# EAGLE board 8x8_3mm_1.6x1.6_skewed_headers_multiplexed (EAGLE 6.0)
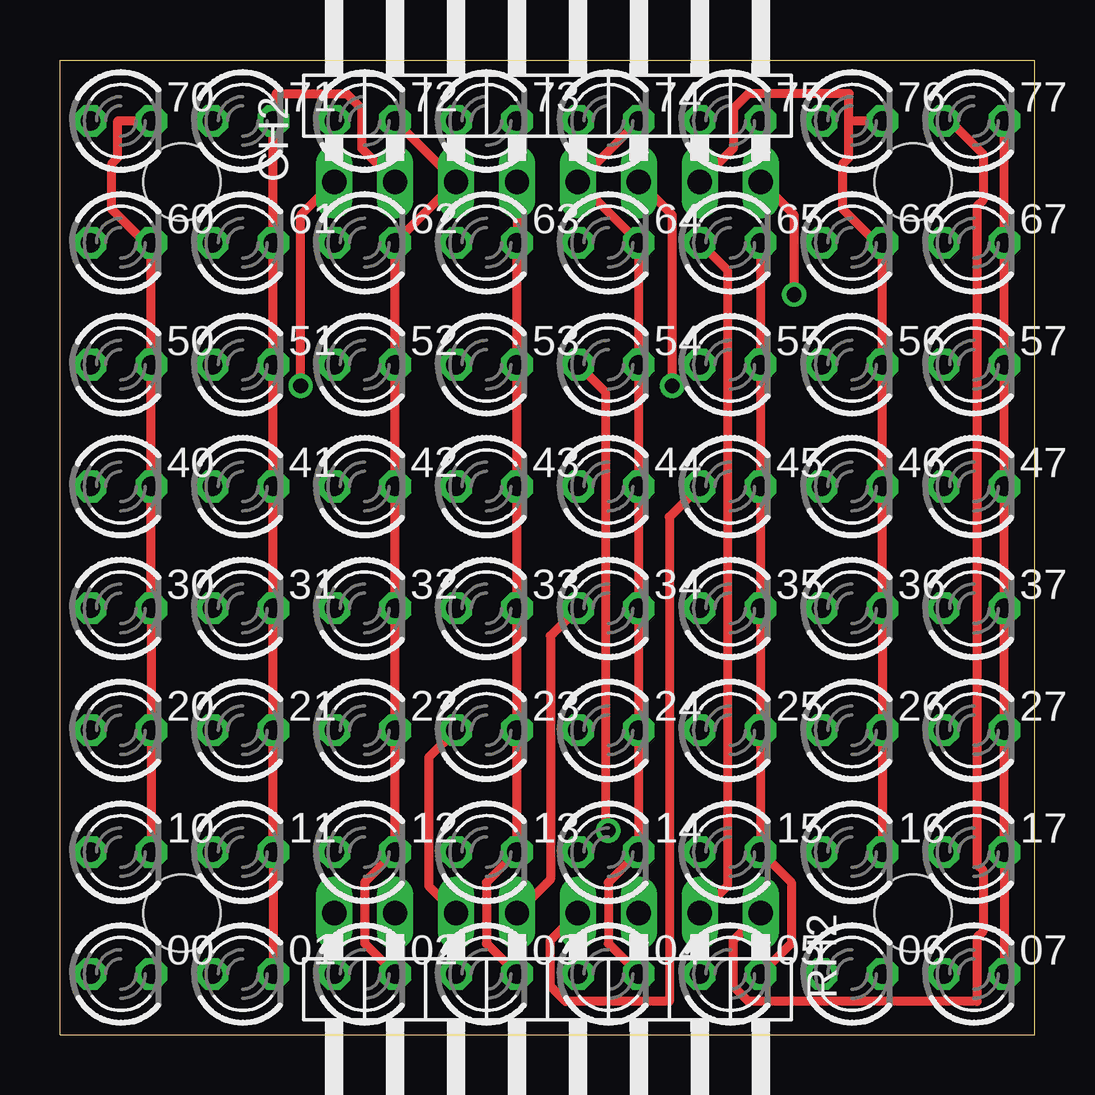
[diagram p0: board, top side]
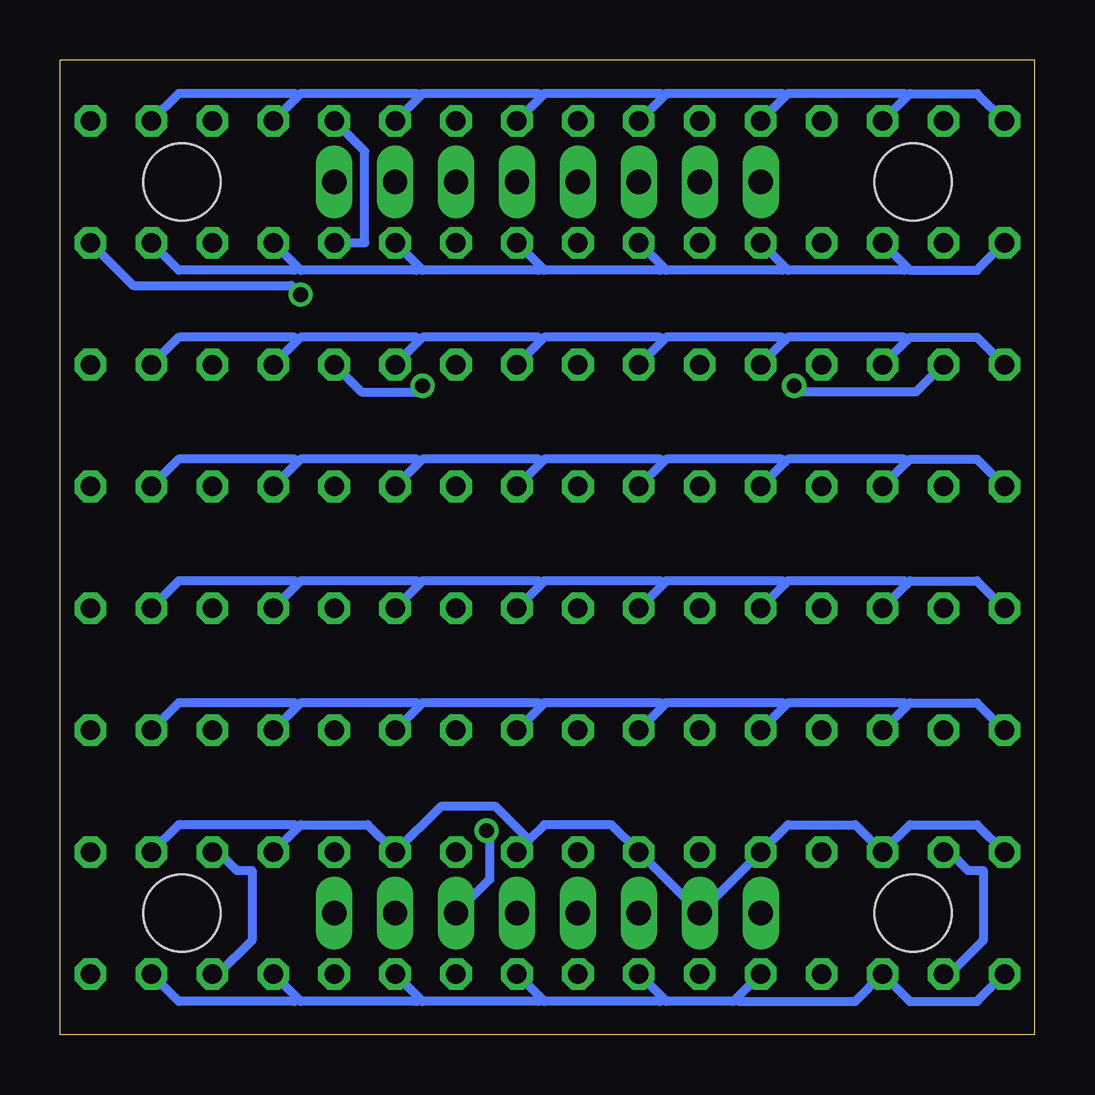
[diagram p1: board, bottom side, seen from below]

Size 40.64 x 40.64 mm. Coordinates in mm from the lower left corner, seen from the top.
Outline: 0,0 0,40.64 40.64,40.64 40.64,0 0,0
Copper layers (1*16): Top 0.035mm / dielectric 1.5mm / Bottom 0.035mm
Design rules: minimum track width 15mil, minimum drill 24mil, track to track 10mil, track to pad 10mil, pad to pad 8mil, via to via 8mil, smd to smd 8mil, copper to edge 40mil, drill to drill 8mil, minimum pad ring 10mil, minimum via ring 8mil, stop-mask expansion 4mil, vias tented up to drill 0mil, thermal gap 10mil
Holes 3.2 mm at 5.08,35.56 35.56,35.56 35.56,5.08 5.08,5.08

## Footprints (pad centres in the part's own frame; a part is rotated, then mirrored left to right if it is on the bottom)
LED3MM = drill 0.813 octagon: A -1.27,0; K 1.27,0
1X08/90 = drill 1.016 long: 1 -8.89,-3.81; 2 -6.35,-3.81; 3 -3.81,-3.81; 4 -1.27,-3.81; 5 1.27,-3.81; 6 3.81,-3.81; 7 6.35,-3.81; 8 8.89,-3.81

## Placement (x,y rotation side)
00  [LED3MM]  2.54,2.54 0 top
01  [LED3MM]  7.62,2.54 0 top
02  [LED3MM]  12.7,2.54 0 top
03  [LED3MM]  17.78,2.54 0 top
04  [LED3MM]  22.86,2.54 0 top
05  [LED3MM]  27.94,2.54 0 top
06  [LED3MM]  33.02,2.54 0 top
07  [LED3MM]  38.1,2.54 0 top
10  [LED3MM]  2.54,7.62 0 top
11  [LED3MM]  7.62,7.62 0 top
12  [LED3MM]  12.7,7.62 0 top
13  [LED3MM]  17.78,7.62 0 top
14  [LED3MM]  22.86,7.62 0 top
15  [LED3MM]  27.94,7.62 0 top
16  [LED3MM]  33.02,7.62 0 top
17  [LED3MM]  38.1,7.62 0 top
20  [LED3MM]  2.54,12.7 0 top
21  [LED3MM]  7.62,12.7 0 top
22  [LED3MM]  12.7,12.7 0 top
23  [LED3MM]  17.78,12.7 0 top
24  [LED3MM]  22.86,12.7 0 top
25  [LED3MM]  27.94,12.7 0 top
26  [LED3MM]  33.02,12.7 0 top
27  [LED3MM]  38.1,12.7 0 top
30  [LED3MM]  2.54,17.78 0 top
31  [LED3MM]  7.62,17.78 0 top
32  [LED3MM]  12.7,17.78 0 top
33  [LED3MM]  17.78,17.78 0 top
34  [LED3MM]  22.86,17.78 0 top
35  [LED3MM]  27.94,17.78 0 top
36  [LED3MM]  33.02,17.78 0 top
37  [LED3MM]  38.1,17.78 0 top
40  [LED3MM]  2.54,22.86 0 top
41  [LED3MM]  7.62,22.86 0 top
42  [LED3MM]  12.7,22.86 0 top
43  [LED3MM]  17.78,22.86 0 top
44  [LED3MM]  22.86,22.86 0 top
45  [LED3MM]  27.94,22.86 0 top
46  [LED3MM]  33.02,22.86 0 top
47  [LED3MM]  38.1,22.86 0 top
50  [LED3MM]  2.54,27.94 0 top
51  [LED3MM]  7.62,27.94 0 top
52  [LED3MM]  12.7,27.94 0 top
53  [LED3MM]  17.78,27.94 0 top
54  [LED3MM]  22.86,27.94 0 top
55  [LED3MM]  27.94,27.94 0 top
56  [LED3MM]  33.02,27.94 0 top
57  [LED3MM]  38.1,27.94 0 top
60  [LED3MM]  2.54,33.02 0 top
61  [LED3MM]  7.62,33.02 0 top
62  [LED3MM]  12.7,33.02 0 top
63  [LED3MM]  17.78,33.02 0 top
64  [LED3MM]  22.86,33.02 0 top
65  [LED3MM]  27.94,33.02 0 top
66  [LED3MM]  33.02,33.02 0 top
67  [LED3MM]  38.1,33.02 0 top
70  [LED3MM]  2.54,38.1 0 top
71  [LED3MM]  7.62,38.1 0 top
72  [LED3MM]  12.7,38.1 0 top
73  [LED3MM]  17.78,38.1 0 top
74  [LED3MM]  22.86,38.1 0 top
75  [LED3MM]  27.94,38.1 0 top
76  [LED3MM]  33.02,38.1 0 top
77  [LED3MM]  38.1,38.1 0 top
CH2  [1X08/90]  20.32,39.37 0 top
RH2  [1X08/90]  20.32,1.27 180 top

## Library data of the parts
00 01-07 10-17 20-27 30-37 40-47 50-57 60-67 70-77 = led
CH2 RH2 = pinhead

## Nets
C0: 00.K 10.K 20.K 30.K 40.K 50.K 60.K 70.K CH2.1
C1: 01.K 11.K 21.K 31.K 41.K 51.K 61.K 71.K CH2.2
C2: 02.K 12.K 22.K 32.K 42.K 52.K 62.K 72.K CH2.3
C3: 03.K 13.K 23.K 33.K 43.K 53.K 63.K 73.K CH2.4
C4: 04.K 14.K 24.K 34.K 44.K 54.K 64.K 74.K CH2.5
C5: 05.K 15.K 25.K 35.K 45.K 55.K 65.K 75.K CH2.6
C6: 06.K 16.K 26.K 36.K 46.K 56.K 66.K 76.K CH2.7
C7: 07.K 17.K 27.K 37.K 47.K 57.K 67.K 77.K CH2.8
R0: 00.A 01.A 02.A 03.A 04.A 05.A 06.A 07.A RH2.8
R1: 10.A 11.A 12.A 13.A 14.A 15.A 16.A 17.A RH2.7
R2: 20.A 21.A 22.A 23.A 24.A 25.A 26.A 27.A RH2.6
R3: 30.A 31.A 32.A 33.A 34.A 35.A 36.A 37.A RH2.5
R4: 40.A 41.A 42.A 43.A 44.A 45.A 46.A 47.A RH2.4
R5: 50.A 51.A 52.A 53.A 54.A 55.A 56.A 57.A RH2.3
R6: 60.A 61.A 62.A 63.A 64.A 65.A 66.A 67.A RH2.2
R7: 70.A 71.A 72.A 73.A 74.A 75.A 76.A 77.A RH2.1

## Tracks (layer width: path | path; a pad name or v marks a point on that pad's centre or on a via)
C0  (via drill 0.61)
  Top 0.381: 70.K 2.41,38.1 2.41,36.58 2.16,36.32 2.16,34.42 3.68,32.89 60.K 50.K 40.K 30.K 20.K 10.K | CH2.1 10.03,34.16 v10.03,27.05
  Bottom 0.381: 00.K 3.56,2.54 2.16,3.94 2.16,6.86 2.79,6.86 3.56,7.62 10.K | v10.03,27.05 9.78,26.8 4.95,26.8 50.K
C1
  Top 0.381: 01.K 11.K 21.K 31.K 41.K 51.K 61.K 71.K 9.02,38.23 9.02,39.24 11.94,39.24 12.57,38.61 12.57,36.96 CH2.2
C2
  Top 0.381: 72.K CH2.3 62.K 52.K 42.K 32.K 22.K 12.K 12.7,6.35 12.7,3.81 02.K
C3
  Top 0.381: 73.K CH2.4 63.K 53.K 43.K 33.K 23.K 13.K 17.78,6.35 17.78,3.81 03.K
C4
  Top 0.381: 74.K CH2.5 64.K 54.K 44.K 34.K 24.K 14.K 22.86,6.35 22.86,3.81 04.K
C5  (via drill 0.61)
  Top 0.381: 05.K 30.48,3.81 30.48,6.35 15.K 25.K 35.K 45.K 55.K 65.K | CH2.6 25.53,34.16 v25.53,27.05
  Bottom 0.381: 75.K 27.94,36.83 27.94,33.02 65.K | v25.53,27.05 25.78,26.8 28.07,26.8 55.K
C6
  Top 0.381: 32.89,38.1 76.K | 32.89,38.1 32.89,36.58 32.64,36.32 32.64,34.42 34.16,32.89 66.K 56.K 46.K 36.K 26.K 16.K | CH2.7 28.07,36.96 28.07,38.61 28.7,39.24 32.89,39.24 32.89,38.1
  Bottom 0.381: 06.K 34.04,2.54 32.64,3.94 32.64,6.86 33.27,6.86 34.04,7.62 16.K
C7  (via drill 0.61)
  Top 0.381: 07.K 17.K 27.K 37.K 47.K 57.K 67.K 77.K | CH2.8 30.61,34.16 v30.61,30.86
  Bottom 0.381: v30.61,30.86 30.99,31.24 37.59,31.24 67.K
R0
  Top 0.381: RH2.8 02.A
  Bottom 0.381: 00.A 2.41,1.4 5.21,1.4 01.A 7.49,1.4 12.32,1.4 12.45,1.52 | 15.49,1.52 15.37,1.4 12.57,1.4 12.45,1.52 | 15.49,1.52 03.A | 02.A 12.45,1.52 | 20.57,1.52 20.45,1.4 15.62,1.4 15.49,1.52 | 20.57,1.52 04.A | 25.65,1.52 25.53,1.4 20.7,1.4 20.57,1.52 | 25.65,1.52 05.A | 30.73,1.52 30.61,1.4 25.78,1.4 25.65,1.52 | 30.73,1.52 06.A | 07.A 35.69,1.4 30.86,1.4 30.73,1.52
R1
  Bottom 0.381: 16.A 30.73,8.64 | 30.73,8.64 30.61,8.76 27.81,8.76 15.A 24.77,9.53 22.48,9.53 21.08,8.13 | 17.A 35.69,8.76 30.86,8.76 30.73,8.64 | 10.A 2.41,8.76 5.21,8.76 11.A 7.49,8.76 10.29,8.76 12.A RH2.7 13.A 17.65,8.76 20.45,8.76 21.08,8.13 | 21.08,8.13 14.A
R2
  Top 0.381: RH2.6 15.37,6.22 15.37,11.56 23.A
  Bottom 0.381: 20.A 2.41,13.84 5.21,13.84 5.33,13.72 | 21.A 5.33,13.72 | 10.41,13.72 10.29,13.84 5.46,13.84 5.33,13.72 | 10.41,13.72 22.A | 15.49,13.72 15.37,13.84 10.54,13.84 10.41,13.72 | 15.49,13.72 23.A | 20.57,13.72 20.45,13.84 15.62,13.84 15.49,13.72 | 20.57,13.72 24.A | 25.65,13.72 25.53,13.84 20.7,13.84 20.57,13.72 | 25.65,13.72 25.A | 30.73,13.72 30.61,13.84 25.78,13.84 25.65,13.72 | 30.73,13.72 26.A | 27.A 35.69,13.84 30.86,13.84 30.73,13.72
R3
  Top 0.381: RH2.5 20.45,6.48 20.45,16.64 34.A
  Bottom 0.381: 30.A 2.41,18.92 5.21,18.92 5.33,18.8 | 31.A 5.33,18.8 | 10.41,18.8 10.29,18.92 5.46,18.92 5.33,18.8 | 10.41,18.8 32.A | 15.49,18.8 15.37,18.92 10.54,18.92 10.41,18.8 | 15.49,18.8 33.A | 20.57,18.8 20.45,18.92 15.62,18.92 15.49,18.8 | 20.57,18.8 34.A | 25.65,18.8 25.53,18.92 20.7,18.92 20.57,18.8 | 25.65,18.8 35.A | 30.73,18.8 30.61,18.92 25.78,18.92 25.65,18.8 | 30.73,18.8 36.A | 37.A 35.69,18.92 30.86,18.92 30.73,18.8
R4
  Top 0.381: RH2.4 20.45,3.94 20.45,2.03 21.08,1.4 25.4,1.4 25.4,21.59 45.A
  Bottom 0.381: 40.A 2.41,24 5.21,24 5.33,23.88 | 41.A 5.33,23.88 | 10.41,23.88 10.29,24 5.46,24 5.33,23.88 | 10.41,23.88 42.A | 15.49,23.88 15.37,24 10.54,24 10.41,23.88 | 15.49,23.88 43.A | 20.57,23.88 20.45,24 15.62,24 15.49,23.88 | 20.57,23.88 44.A | 25.65,23.88 25.53,24 20.7,24 20.57,23.88 | 25.65,23.88 45.A | 30.73,23.88 30.61,24 25.78,24 25.65,23.88 | 30.73,23.88 46.A | 47.A 35.69,24 30.86,24 30.73,23.88
R5  (via drill 0.61)
  Top 0.381: v22.86,8.51 22.73,8.64 22.73,26.8 54.A
  Bottom 0.381: 50.A 2.41,29.08 5.21,29.08 5.33,28.96 | 51.A 5.33,28.96 | 10.41,28.96 10.29,29.08 5.46,29.08 5.33,28.96 | 10.41,28.96 52.A | 15.49,28.96 15.37,29.08 10.54,29.08 10.41,28.96 | 15.49,28.96 53.A | 20.57,28.96 20.45,29.08 15.62,29.08 15.49,28.96 | 20.57,28.96 54.A | 25.65,28.96 25.53,29.08 20.7,29.08 20.57,28.96 | 25.65,28.96 55.A | 30.73,28.96 30.61,29.08 25.78,29.08 25.65,28.96 | 30.73,28.96 56.A | 57.A 35.69,29.08 30.86,29.08 30.73,28.96 | RH2.3 22.73,6.48 22.73,8.51 v22.86,8.51
R6
  Top 0.381: RH2.2 27.81,6.22 27.81,31.88 65.A
  Bottom 0.381: 60.A 2.41,31.88 5.21,31.88 5.33,32 | 61.A 5.33,32 | 10.41,32 10.29,31.88 5.46,31.88 5.33,32 | 10.41,32 62.A | 15.49,32 15.37,31.88 10.54,31.88 10.41,32 | 15.49,32 63.A | 20.57,32 20.45,31.88 15.62,31.88 15.49,32 | 20.57,32 64.A | 25.65,32 25.53,31.88 20.7,31.88 20.57,32 | 25.65,32 65.A | 30.73,32 30.61,31.88 25.78,31.88 25.65,32 | 30.73,32 66.A | 67.A 35.69,31.88 30.86,31.88 30.73,32
R7
  Top 0.381: RH2.1 28.07,3.94 28.07,2.03 28.7,1.4 38.23,1.4 38.23,4.06 38.48,4.32 38.48,6.86 38.23,7.11 38.23,34.54 38.48,34.8 38.48,36.7 37.08,38.1 77.A
  Bottom 0.381: 70.A 2.41,39.24 5.21,39.24 5.33,39.12 | 71.A 5.33,39.12 | 10.41,39.12 10.29,39.24 5.46,39.24 5.33,39.12 | 10.41,39.12 72.A | 15.49,39.12 15.37,39.24 10.54,39.24 10.41,39.12 | 15.49,39.12 73.A | 20.57,39.12 20.45,39.24 15.62,39.24 15.49,39.12 | 20.57,39.12 74.A | 25.65,39.12 25.53,39.24 20.7,39.24 20.57,39.12 | 25.65,39.12 75.A | 30.73,39.12 30.61,39.24 25.78,39.24 25.65,39.12 | 30.73,39.12 76.A | 77.A 35.69,39.24 30.86,39.24 30.73,39.12